# Altium PCB microsmt_pnpboard_v17.pcbdoc (part 2 of 3)
Units mil, origin at the board's own origin, x right, y up, seen from the top; angles counter-clockwise.
Board outline 5834.36 x 5120.39 mil, 2 copper layers (Top Layer, Bottom Layer); 189 components, 130 nets, 641 pads, 1441 vias.
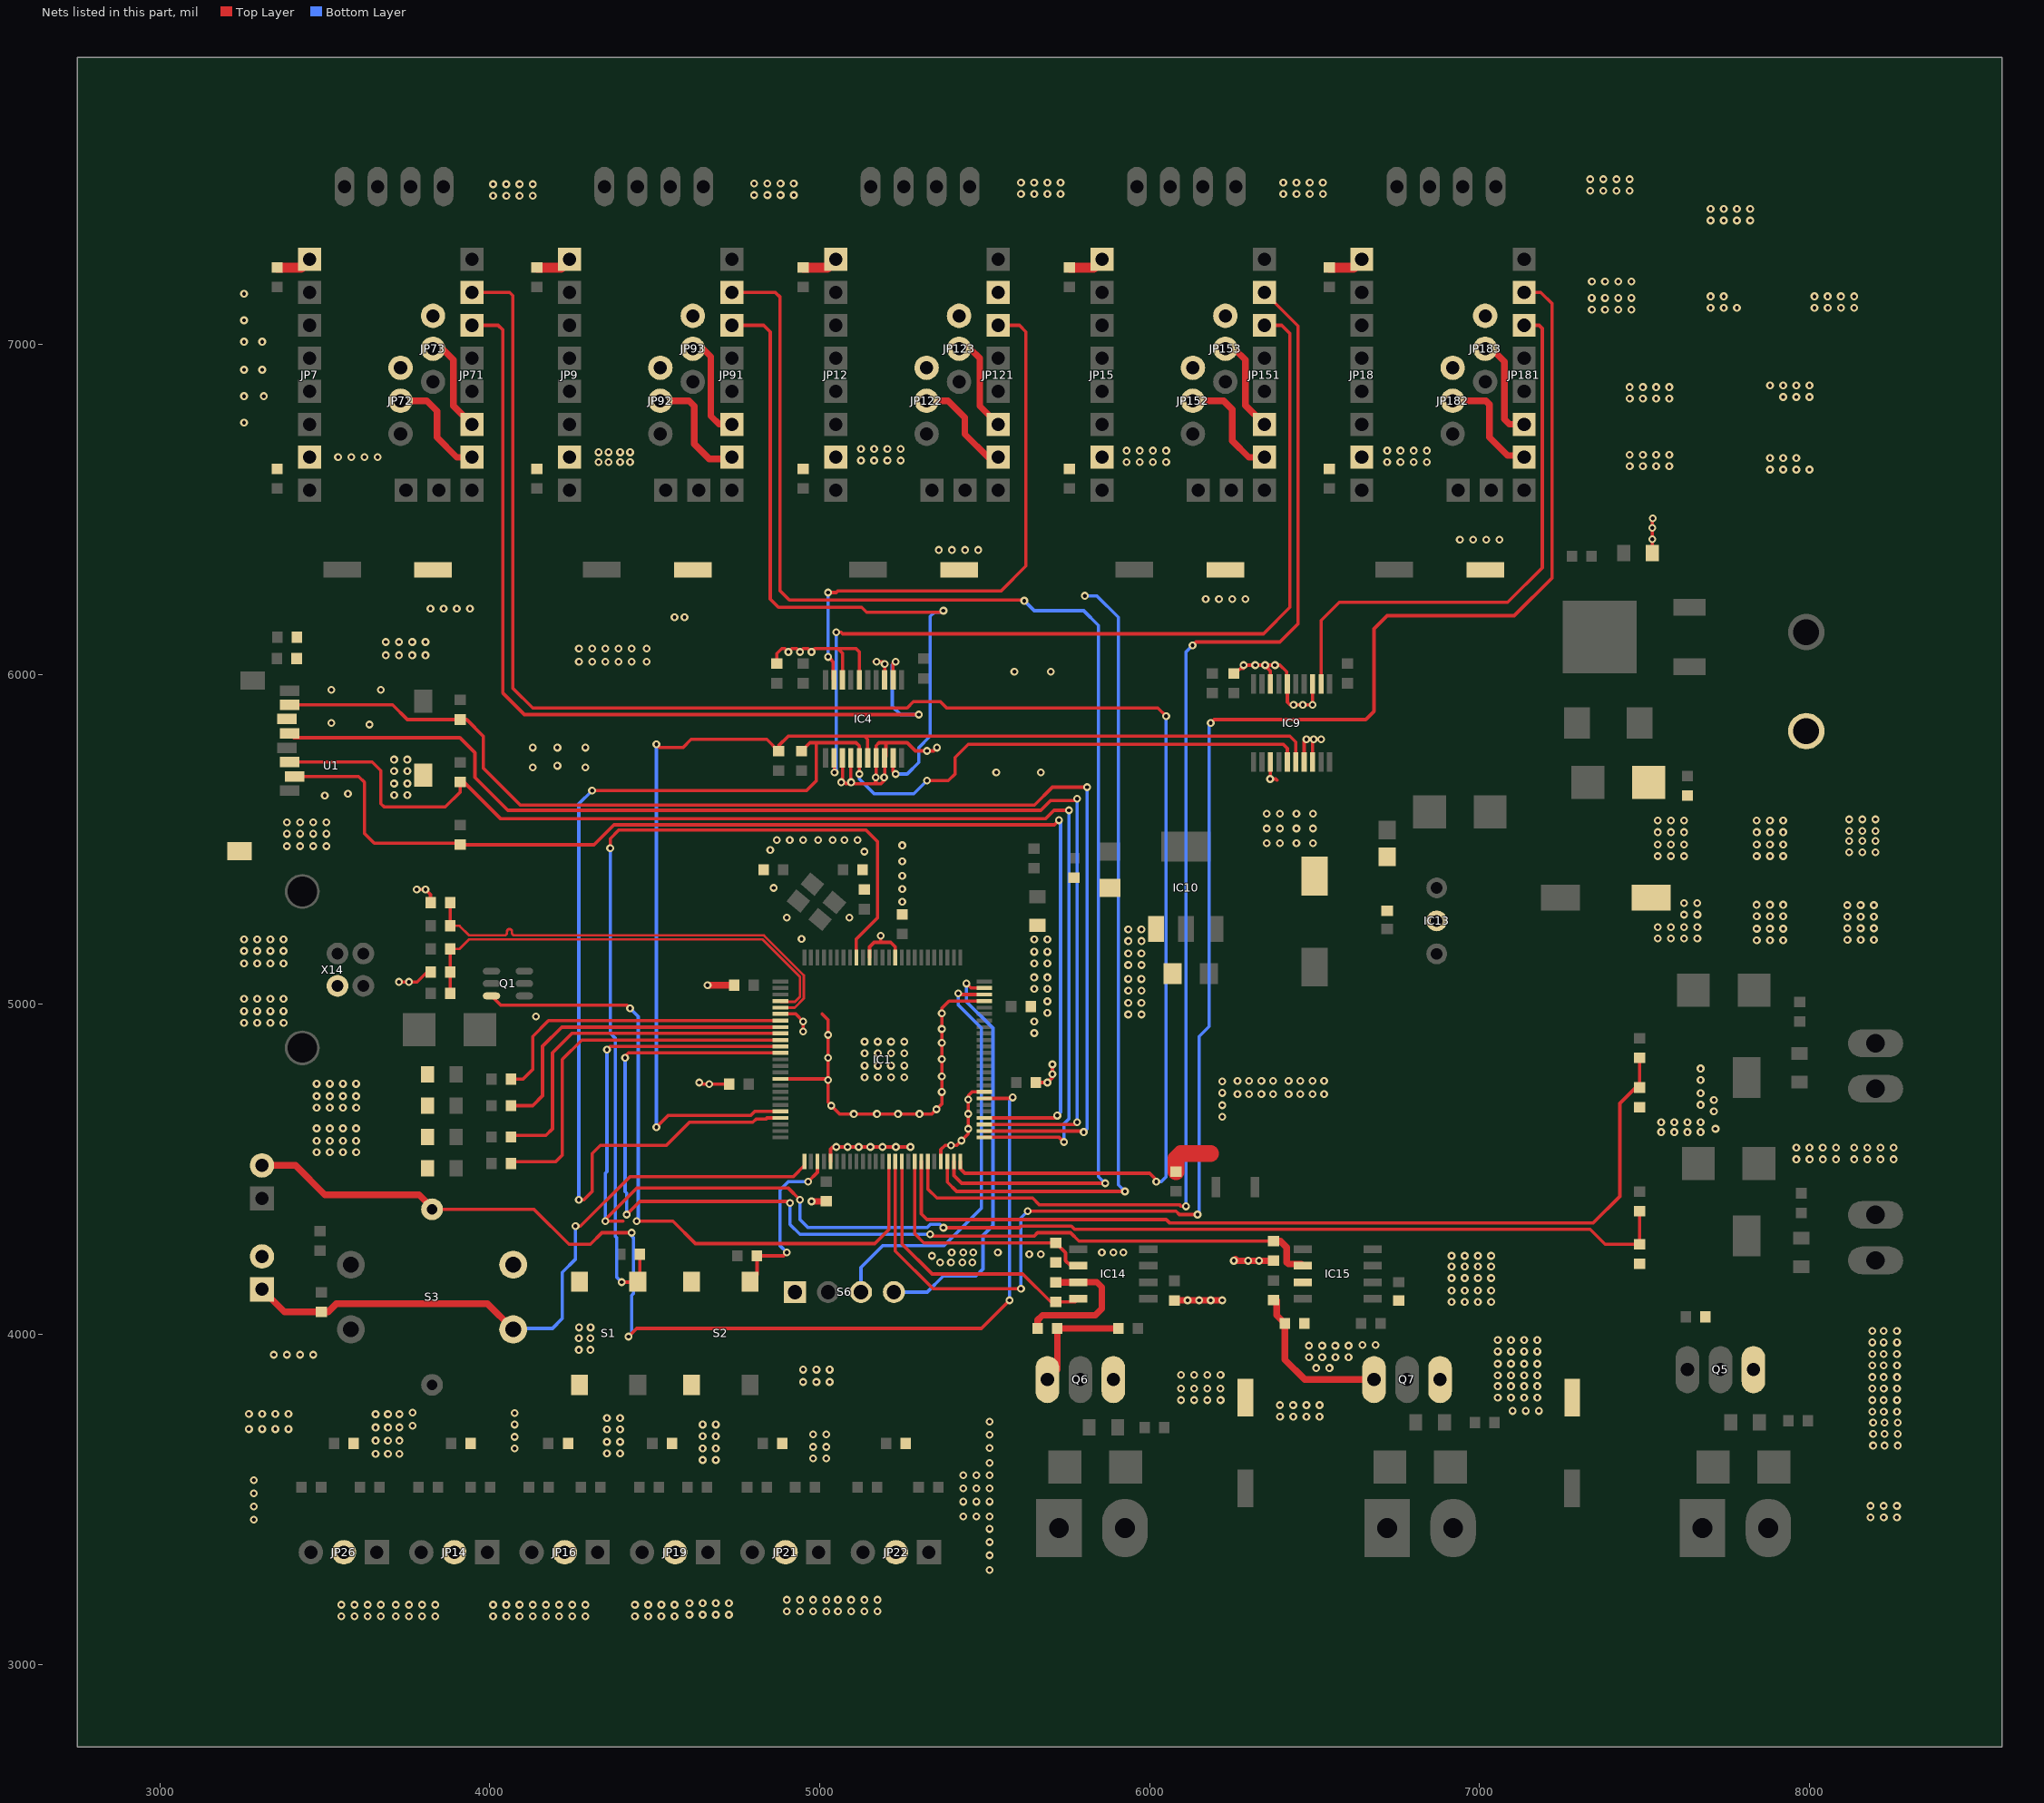
[diagram p2: the nets of this part, all layers, seen from the top]

## Via types
v1: diameter 24, hole 12, Top Layer to Bottom Layer, 1009 vias
v2: diameter 24.02, hole 12.01, Top Layer to Bottom Layer, 428 vias
v3: diameter 149.61, hole 137.8, Top Layer to Bottom Layer, 4 vias

## Nets (pads, with @x,y where several pads share a name; then routed paths per layer and width w, separated by ;. In a path a pad name is that pad's centre, name@x,y a point inside that pad or via, vN(x,y) a via of type N, cw(c..) or ccw(c..) an arc to the next point about the centre after c; other vN are vias at no path point) (continued)
GND: C1.1 C2.2 C3.2 C4.1 C5.1 C7.C C8.1 C9.1 C10.1 C11.1 C12.1 C13.1 C14.1 C31.1 C62.2 C63.2 C64.C C65.2 C66.2 C67.1 C68.1 C75.2 C76.2 C77.2 C78.2 C79.2 C80.2 C81.2 C82.2 C83.2 C84.2 C85.2 C86.2 C87.2 C88.2 C89.2 C90.2 C91.2 C92.2 C93.2 C94.2 C95.2 C96.2 C97.2 C98.2 C99.2 C101.2 C102.2 D4.A IC1.11 IC1.15 IC1.31 IC1.41 IC1.55 IC1.72 IC1.83 IC1.97 IC4.3 IC4.4 IC4.7 IC4.8 IC4.13 IC4.16 IC4.18 IC9.3 IC9.7 IC9.8 IC9.13 IC9.16 IC9.18 IC10.1 IC13.2 IC14.3 IC15.3 J1.1 JP7.1 JP7.7 JP9.1 JP9.7 JP12.1 JP12.7 JP14.2 JP15.1 JP15.7 JP16.2 JP18.1 JP18.7 JP19.2 JP21.2 JP22.2 JP23.2 JP26.2 JP72.3 JP73.3 JP92.3 JP93.3 JP122.3 JP123.3 JP152.3 JP153.3 JP182.3 JP183.3 LED1.1 LED2.1 LED3.1 LED4.1 LED9.1 LED10.1 Q5.S Q6.S Q7.S R71.1 R72.1 R74.2 R83.2 R86.2 R87.1 R89.2 R90.2 R91.2 S1.2 S1.4 S2.2 S2.4 S3.2 S6.1 U1.6 U1.CD2 U1.GND1 X14.GND | length 6173.9
  Top Layer w10: v2(3725.5,5068.39) v2(3755.5,5068.39) 3780.5,5068.39 3810.5,5098.39 C5.1@3820.84,5098.39 ; v2(3779.2,5348.39) v2(3805.5,5348.39) 3820.84,5333.05 C4.1@3820.84,5308.39 ; v1(4635.5,4763.39) 4640.5,4763.39 4645.5,4758.39 v1(4665.5,4758.39) C9.1@4726.18,4758.39 ; C31.1@4870.5,6032.71 4870.5,6063.39 4885.5,6078.39 4895.5,6078.39 v1(4905.5,6068.39) 4915.5,6078.39 4930.5,6078.39 v1(4940.5,6068.39) 4950.5,6078.39 4965.5,6078.39 v1(4975.5,6068.39) 4985.5,6078.39 5055.5,6078.39 ; IC1.41@4881.5,4774.38 5016.93,4774.38 v1@5025.5,4765.81 ; IC1.31@4881.5,4971.38 4927.5,4971.38 v2(4950.5,4948.39) v2(4950.5,4918.39) ; 5007.5,4971.38 5025.5,4953.39 v1(5025.5,4907.77) v1(5025.5,4838.55) v1@5025.5,4765.81 ; IC1.55@5033.5,4524.38 5033.5,4561.39 5040.5,4568.39 v1(5084.75,4568.39) v1(5118.61,4568.39) v1(5154.05,4568.39) v1(5190.57,4568.39) v1(5231.42,4568.39) v1(5275.5,4568.39) v1@5280.5,4573.39 ; IC4.3@5069.32,5747.09 5069.32,5679.57 5080.5,5668.39 5090.5,5668.39 v1(5095.5,5673.39) ; IC4.18@5069.32,5983.19 5069.32,6064.57 5055.5,6078.39 ; IC4.4@5094.91,5747.09 5094.91,5673.98 v1(5095.5,5673.39) ; IC4.16@5120.5,5983.39 5120.5,6068.39 5110.5,6078.39 5055.5,6078.39 ; IC1.15@5151.5,5142.38 5151.5,5174.39 5165.5,5188.39 5185.67,5188.39 ; v1@5165.5,6038.39 5190.5,6038.39 v1(5197.27,6031.62) IC4.13@5197.27,5983.39 ; 5169.66,5674.9 5171.68,5672.88 5167.19,5668.39 ; 5170.5,5674.06 5170.5,5675.75 ; v1(5170.5,5688.39) 5170.5,5675.75 ; v2(5185.5,5208.39) 5185.5,5188.55 5185.67,5188.39 ; IC1.11@5229.5,5142.38 5229.5,5174.39 5215.5,5188.39 5185.67,5188.39 ; v1(5355.5,5778.39) 5345.5,5768.39 v1(5325.5,5768.39) 5290.5,5768.39 5265.5,5793.39 5201.16,5793.39 ; IC1.72@5367.5,4524.38 5367.5,4560.39 5380.5,4573.39 v1(5398.52,4573.39) 5415.5,4573.39 v1(5429.77,4587.65) 5450.5,4608.39 v1(5450.5,4623.22) v1(5450.5,4668.68) 5450.5,4723.39 5462.5,4735.38 IC1.83@5499.5,4735.38 ; IC1.97@5499.5,5010.38 5392.5,5010.38 5370.5,4988.39 v1(5370.5,4973.39) v1(5370.5,4925.67) v1(5370.5,4883.84) v1(5370.5,4834.36) v1(5370.5,4781.93) v1(5370.5,4734.8) 5370.5,4698.39 v1(5354.58,4682.46) 5340.5,4668.39 v1(5302.83,4668.39) v1(5238.03,4668.39) v1(5173.82,4668.39) v1(5103.71,4668.39) 5060.5,4668.39 v1(5035.65,4693.24) 5025.5,4703.39 v1@5025.5,4765.81 ; C12.1@5655.5,4763.39 v1(5690.5,4763.39) 5705.5,4778.39 v1(5705.5,4818.39) ; C68.1@6255.5,6003.39 6260.5,6003.39 6275.5,6018.39 6285.5,6018.39 6295.5,6028.39 v1(6320.5,6028.39) v1(6350.5,6028.39) 6350.5,6026.68 6358.79,6018.39 ; IC9.3@6366.52,5735.24 6366.52,5689.41 6365.5,5688.39 v1(6365.5,5683.39) 6382.87,5683.39 6386.85,5679.41 ; IC9.18@6366.52,5971.34 6366.52,6010.65 6358.79,6018.39 ; IC9.7@6468.89,5735.24 6468.89,5796.77 v1(6475.5,5803.39) v1(6497.69,5803.39) ; IC9.8@6494.48,5735.24 6494.48,5800.18 v1(6497.69,5803.39) ; IC9.13@6494.48,5971.54 v1(6494.48,5908.39) v1(6464.57,5908.39) 6425.5,5908.39 6417.7,5916.18 IC9.16@6417.7,5971.54 6415.5,5973.75 6415.5,6008.39 6395.5,6028.39 v1(6380.5,6028.39) 6358.79,6028.39 6358.79,6018.39 ; v1(6520.5,5803.39) v1(6497.69,5803.39) ; LED10.1@7523.81,6368.39 v1(7523.81,6409.82) v1(7523.81,6444.58) 7523.81,6471.7 v1(7525.5,6473.39) ; v1(5095.5,5673.39) 5100.5,5668.39 5167.19,5668.39 ; 5167.19,5668.39 5185.5,5668.39 5195.5,5678.39 v1(5195.5,5688.39) 5197.27,5690.16 IC4.8@5197.27,5747.09 5201.16,5750.98 5201.16,5793.39 ; 5170.5,5675.75 5171.68,5674.57 IC4.7@5171.68,5747.09 5171.68,5784.57 5180.5,5793.39 5201.16,5793.39
  Top Layer w20: v2(4660.5,5058.39) C10.1@4741.18,5058.39 ; v1(4975.5,4403.39) C8.1@5020.5,4403.39 ; R90.2@5661.18,4018.39 5661.18,4044.07 5675.5,4058.39 5835.5,4058.39 5855.5,4078.39 5855.5,4143.39 5840.5,4158.39 IC14.3@5784.5,4158.39 5783.82,4157.71 R72.1@5715.5,4157.71 ; C66.2@6075.5,4103.39 v1(6115.5,4103.39) v1(6150.5,4103.39) v1(6185.5,4103.39) v1(6220.5,4103.39) ; v1(6255.5,4223.39) 6260.5,4228.39 6265.5,4223.39 v1(6299.24,4223.39) v1(6332.23,4223.39) R87.1@6375.5,4223.39
  Top Layer w30: C85.2@3355.97,7233.09 3429.34,7233.09 JP7.1@3454.4,7258.15 ; C88.2@4143.37,7233.09 4216.73,7233.09 JP9.1@4241.8,7258.15 ; C91.2@4950.46,7233.09 5023.82,7233.09 JP12.1@5048.89,7258.15 ; C94.2@5757.55,7233.09 5830.91,7233.09 JP15.1@5855.97,7258.15 ; C97.2@6544.95,7233.09 6618.31,7233.09 JP18.1@6643.37,7258.15
  Top Layer w50: C62.2@6080.5,4493.05 6080.5,4533.39 6095.5,4548.39 6185.5,4548.39
  other v1: 3550.6,3145.89 3590.55,3145.89 3630.51,3145.89 3670.47,3145.89 3715.6,3145.89 3755.55,3145.89 3795.51,3145.89 3835.47,3145.89 4010.6,3145.89 4050.55,3145.89 4090.51,3145.89 4130.47,3145.89 4170.6,3145.89 4210.55,3145.89 4250.51,3145.89 4290.47,3145.89 4440.6,3145.89 4480.55,3145.89 4520.51,3145.89 4560.47,3145.89 4605.6,3150.89 4645.55,3150.89 4685.51,3150.89 4725.47,3150.89 4900.6,3160.89 4940.55,3160.89 4980.51,3160.89 5020.47,3160.89 5055.6,3160.89 5095.55,3160.89 5135.51,3160.89 5175.47,3160.89 3550.53,3180.89 3590.49,3180.89 3630.45,3180.89 3670.4,3180.89 3715.53,3180.89 3755.49,3180.89 3795.45,3180.89 3835.4,3180.89 4010.53,3180.89 4050.49,3180.89 4090.45,3180.89 4130.4,3180.89 4170.53,3180.89 4210.49,3180.89 4250.45,3180.89 4290.4,3180.89 4440.53,3180.89 4480.49,3180.89 4520.45,3180.89 4560.4,3180.89 4605.53,3185.89 4645.49,3185.89 4685.45,3185.89 4725.4,3185.89 4900.53,3195.89 4940.49,3195.89 4980.45,3195.89 5020.4,3195.89 5055.53,3195.89 5095.49,3195.89 5135.45,3195.89 5175.4,3195.89 5515.5,3285.89 5515.5,3330.89 5515.5,3370.89 5515.5,3410.89 3285.5,3438.45 8185.55,3445.89 8225.51,3445.89 8265.47,3445.89 5435.54,3448.39 5475.5,3448.39 5515.46,3448.39 3285.5,3478.41 8185.49,3480.89 8225.45,3480.89 8265.4,3480.89 5435.54,3493.39 5475.5,3493.39 5515.46,3493.39 3285.5,3518.36 5435.54,3533.39 5475.5,3533.39 5515.46,3533.39 3285.5,3558.32 5435.54,3573.39 5475.5,3573.39 5515.46,3573.39 5515.5,3610.89 4645.57,3619.64 4685.53,3619.64 4980.57,3624.64 5020.53,3624.64 3654.25,3638.45 3691.75,3638.42 3726.75,3638.48 4355.57,3639.64 4395.53,3639.64 4075.53,3654.64 4645.51,3654.64 4685.46,3654.64 5515.5,3655.89 4980.51,3659.64 5020.46,3659.64 8193,3663.39 8227.94,3663.39 8268,3663.39 4355.51,3674.64 4395.46,3674.64 3654.25,3678.41 3691.75,3678.38 3726.75,3678.44 4075.46,3689.64 4645.54,3692.14 4685.49,3692.14 5515.5,3695.89 4980.54,3697.14 5020.49,3697.14 8193,3698.39 8227.94,3698.39 8268,3698.39 4355.54,3712.14 4395.49,3712.14 3270.56,3713.39 3310.52,3713.39 3350.48,3713.39 3390.44,3713.39 3654.25,3718.36 3691.75,3718.33 3726.75,3718.4 3766.75,3723.36 4075.49,3727.14 4645.47,3727.14 4685.43,3727.14 8193,3733.39 8227.94,3733.39 8268,3733.39 5515.5,3735.89 4355.47,3747.14 4395.43,3747.14 6395.6,3750.89 6435.55,3750.89 6475.51,3750.89 6515.47,3750.89 3654.25,3758.32 3691.75,3758.29 3726.75,3758.35 3270.6,3759.2 3310.55,3759.2 3350.51,3759.2 3390.47,3759.2 4075.43,3762.14 3766.75,3763.32 8190.56,3765.89 8225.5,3765.89 8265.56,3765.89 7100.56,3768.39 7140.52,3768.39 7180.48,3768.39 6395.53,3785.89 6435.49,3785.89 6475.45,3785.89 6515.4,3785.89 6095.6,3800.89 6135.55,3800.89 6175.51,3800.89 6215.47,3800.89 8190.5,3800.89 8225.44,3800.89 8265.5,3800.89 7055.56,3808.39 7095.52,3808.39 7135.48,3808.39 7175.44,3808.39 6095.53,3835.89 6135.49,3835.89 6175.45,3835.89 6215.4,3835.89 8190.56,3835.89 8225.5,3835.89 8265.56,3835.89 7055.56,3843.39 7095.52,3843.39 7135.48,3843.39 7175.44,3843.39 4950.53,3855.89 4990.49,3855.89 5030.45,3855.89 8190.5,3870.89 8225.44,3870.89 8265.5,3870.89 7055.6,3875.89 7095.55,3875.89 7135.51,3875.89 7175.47,3875.89 6095.58,3877.14 6135.54,3877.14 6175.49,3877.14 6215.45,3877.14 4950.54,3893.39 4990.5,3893.39 5030.46,3893.39 6505.52,3898.39 6545.48,3898.39 8190.56,3905.89 8225.47,3905.89 8265.53,3905.89 7055.53,3910.89 7095.49,3910.89 7135.45,3910.89 7175.4,3910.89 6483.55,3930.89 6523.51,3930.89 6563.47,3930.89 6603.42,3930.89 3345.56,3938.39 3385.52,3938.39 3425.48,3938.39 3465.44,3938.39 8190.5,3940.89 8225.4,3940.89 8265.47,3940.89 7055.56,3948.39 7095.52,3948.39 7135.48,3948.39 7175.44,3948.39 4270.5,3953.39 4305.5,3953.39 6483.49,3965.89 6523.44,3965.89 6563.4,3965.89 6603.36,3965.89 6645.52,3968.39 6685.48,3968.39 8190.56,3975.89 8225.47,3975.89 8265.53,3975.89 7055.56,3983.39 7095.52,3983.39 7135.48,3983.39 7175.44,3983.39 4270.5,3988.39 4305.5,3988.39 8190.5,4010.89 8225.4,4010.89 8265.47,4010.89 4270.66,4021.26 4306.09,4021.26 6915.56,4098.39 6955.52,4098.39 6995.48,4098.39 7035.44,4098.39 6915.56,4133.39 6955.52,4133.39 6995.48,4133.39 7035.44,4133.39 6915.6,4170.89 6955.55,4170.89 6995.51,4170.89 7035.47,4170.89 6915.53,4205.89 6955.49,4205.89 6995.45,4205.89 7035.4,4205.89 6915.56,4238.39 6955.52,4238.39 6995.48,4238.39 7035.44,4238.39 7960.6,4530.89 8000.55,4530.89 8040.51,4530.89 8080.47,4530.89 8135.6,4530.89 8175.55,4530.89 8215.51,4530.89 8255.47,4530.89 3475.6,4552.14 3515.55,4552.14 3555.51,4552.14 3595.47,4552.14 7960.53,4565.89 8000.49,4565.89 8040.45,4565.89 8080.4,4565.89 8135.53,4565.89 8175.49,4565.89 8215.45,4565.89 8255.4,4565.89 5050.89,4568.39 3475.53,4587.14 3515.49,4587.14 3555.45,4587.14 3595.4,4587.14 7550.56,4613.39 7590.52,4613.39 7630.48,4613.39 7670.44,4613.39 7715.5,4623.39 3475.56,4624.64 3515.52,4624.64 3555.48,4624.64 3595.44,4624.64 7550.56,4643.39 7590.52,4643.39 7630.48,4643.39 7670.44,4643.39 6220.53,4659.64 7710.53,4675.89 3475.6,4687.14 3515.55,4687.14 3555.51,4687.14 3595.47,4687.14 6220.46,4694.64 7670.53,4695.89 7710.47,4710.89 5450.5,4711.62 3475.53,4722.14 3515.49,4722.14 3555.45,4722.14 3595.4,4722.14 6266.75,4728.36 6301.75,4728.42 6339.25,4728.39 6374.25,4728.46 6421.75,4728.36 6456.75,4728.42 6494.25,4728.39 6529.25,4728.46 7670.47,4730.89 6220.49,4732.14 3475.56,4759.64 3515.52,4759.64 3555.48,4759.64 3595.44,4759.64 6220.43,4767.14 6266.75,4768.32 6301.75,4768.38 6339.25,4768.35 6374.25,4768.41 6421.75,4768.32 6456.75,4768.38 6494.25,4768.35 6529.25,4768.41 5025.5,4771.32 7670.53,4770.89 5136.66,4779.63 5176.62,4779.63 5216.58,4779.63 5256.54,4779.63 5705.5,4788.66 7670.47,4805.89 5136.6,4814.63 5176.56,4814.63 5216.52,4814.63 5256.47,4814.63 5136.63,4852.13 5176.59,4852.13 5216.55,4852.13 5256.5,4852.13 5136.57,4887.13 5176.53,4887.13 5216.48,4887.13 5256.44,4887.13 5650.5,4913.39 3255.61,4944.64 3295.57,4944.64 3335.53,4944.64 3375.48,4944.64 5650.5,4948.39 5935.57,4969.64 5975.53,4969.64 5690.53,4974.64 3255.55,4979.64 3295.51,4979.64 3335.46,4979.64 3375.42,4979.64 5935.51,5004.64 5975.46,5004.64 5690.46,5009.64 3255.58,5017.14 3295.54,5017.14 3335.49,5017.14 3375.45,5017.14 5935.54,5042.14 5975.49,5042.14 5650.54,5047.14 5690.49,5047.14 5935.47,5077.14 5975.43,5077.14 5650.47,5082.14 5690.43,5082.14 5935.57,5119.64 5975.53,5119.64 3255.55,5124.64 3295.51,5124.64 3335.46,5124.64 3375.42,5124.64 5650.57,5124.64 5690.53,5124.64 5935.51,5154.64 5975.46,5154.64 5650.51,5159.64 5690.46,5159.64 3255.58,5162.14 3295.54,5162.14 3335.49,5162.14 3375.45,5162.14 5935.54,5192.14 5975.49,5192.14 7840.61,5194.64 7880.57,5194.64 7920.53,5194.64 8115.55,5195.89 8155.51,5195.89 8195.47,5195.89 3255.52,5197.14 3295.47,5197.14 3335.43,5197.14 3375.39,5197.14 5650.54,5197.14 5690.49,5197.14 7540.61,5199.64 7580.57,5199.64 7620.53,5199.64 7660.48,5199.64 5935.47,5227.14 5975.43,5227.14 7840.55,5229.64 7880.51,5229.64 7920.46,5229.64 8115.49,5230.89 8155.45,5230.89 8195.4,5230.89 7540.55,5234.64 7580.51,5234.64 7620.46,5234.64 7660.42,5234.64 8115.55,5265.89 8155.51,5265.89 8195.47,5265.89 7840.58,5267.14 7880.54,5267.14 7920.49,5267.14 7620.49,5272.14 7660.45,5272.14 8115.49,5300.89 8155.45,5300.89 8195.4,5300.89 7840.52,5302.14 7880.47,5302.14 7920.43,5302.14 7620.43,5307.14 7660.39,5307.14 5250.5,5311.24 5250.5,5350.12 5250.5,5389.5 5250.5,5433.68 7540.61,5449.64 7580.57,5449.64 7620.53,5449.64 7840.61,5449.64 7880.57,5449.64 7920.53,5449.64 8120.55,5460.89 8160.51,5460.89 8200.47,5460.89 5135.5,5463.39 4850.5,5468.39 3385.55,5479.64 3425.51,5479.64 3465.46,5479.64 3505.42,5479.64 5250.5,5482.28 7540.55,5484.64 7580.51,5484.64 7620.46,5484.64 7840.55,5484.64 7880.51,5484.64 7920.46,5484.64 8120.49,5495.89 8160.45,5495.89 8200.4,5495.89 4870.5,5498.39 4909.59,5498.39 4950.33,5498.39 4995.5,5498.39 5039.46,5498.39 5075.5,5498.39 5115.5,5498.39 3385.58,5517.14 3425.54,5517.14 3465.49,5517.14 3505.45,5517.14 7540.58,5522.14 7580.54,5522.14 7620.49,5522.14 7840.58,5522.14 7880.54,5522.14 7920.49,5522.14 8120.55,5525.89 8160.51,5525.89 8200.47,5525.89 3385.52,5552.14 3425.47,5552.14 3465.43,5552.14 3505.39,5552.14 7540.52,5557.14 7580.47,5557.14 7620.43,5557.14 7840.52,5557.14 7880.47,5557.14 7920.43,5557.14 8120.49,5560.89 8160.45,5560.89 8200.4,5560.89 3710.57,5634.64 3750.53,5634.64 3710.51,5669.64 3750.46,5669.64 5065.5,5673.39 3710.54,5707.14 3750.49,5707.14 3710.47,5742.14 3750.43,5742.14 6436.81,5908.39 6285.5,6028.39 4270.56,6038.39 4310.52,6038.39 4350.48,6038.39 4390.44,6038.39 4430.5,6038.39 4475.5,6038.39 5172.84,6038.39 3685.56,6058.39 3725.52,6058.39 3765.48,6058.39 3805.44,6058.39 4270.56,6078.39 4310.52,6078.39 4350.48,6078.39 4390.44,6078.39 4430.5,6078.39 4475.5,6078.39 3685.56,6098.39 3725.52,6098.39 3765.48,6098.39 3805.44,6098.39 4560.5,6173.39 4590.5,6173.39 3820.61,6199.64 3860.57,6199.64 3900.53,6199.64 3940.48,6199.64 6170.5,6228.39 6210.5,6228.39 6250.5,6228.39 6290.5,6228.39 5361.39,6377.37 5401.35,6377.37 5441.3,6377.37 5481.26,6377.37 6940.5,6408.39 6980.5,6408.39 7020.5,6408.39 7060.5,6408.39 7880.6,6620.89 7920.55,6620.89 7960.51,6620.89 8000.47,6620.89 7455.6,6630.89 7495.55,6630.89 7535.51,6630.89 7575.47,6630.89 4330.5,6643.39 4360.5,6643.39 4395.5,6643.39 4425.5,6643.39 5930.5,6643.39 5970.5,6643.39 6010.5,6643.39 6050.5,6643.39 6720.5,6643.39 6760.5,6643.39 6800.5,6643.39 6840.5,6643.39 5125.56,6648.39 5165.52,6648.39 5205.48,6648.39 5245.44,6648.39 7880.53,6655.89 7920.49,6655.89 7960.45,6655.89 3540.56,6658.39 3580.52,6658.39 3620.48,6658.39 3660.44,6658.39 7455.53,6665.89 7495.49,6665.89 7535.45,6665.89 7575.4,6665.89 4330.5,6673.39 4360.5,6673.39 4395.5,6673.39 4425.5,6673.39 5930.5,6678.39 5970.5,6678.39 6010.5,6678.39 6050.5,6678.39 6720.5,6678.39 6760.5,6678.39 6800.5,6678.39 6840.5,6678.39 5125.56,6683.39 5165.52,6683.39 5205.48,6683.39 5245.44,6683.39 7455.6,6835.89 7495.55,6835.89 7535.51,6835.89 7575.47,6835.89 7920.55,6840.89 7960.51,6840.89 8000.47,6840.89 7455.53,6870.89 7495.49,6870.89 7535.45,6870.89 7575.4,6870.89 7880.53,6875.89 7920.49,6875.89 7960.45,6875.89 8000.4,6875.89 7340.6,7105.89 7380.55,7105.89 7420.51,7105.89 7460.47,7105.89 7700.6,7110.89 7740.55,7110.89 7780.51,7110.89 8015.6,7110.89 8055.55,7110.89 8095.51,7110.89 8135.47,7110.89 7340.53,7140.89 7380.49,7140.89 7420.45,7140.89 7460.4,7140.89 7700.53,7145.89 7740.49,7145.89 8015.53,7145.89 8055.49,7145.89 8095.45,7145.89 8135.4,7145.89 7340.6,7190.89 7380.55,7190.89 7420.51,7190.89 7460.47,7190.89 7700.6,7375.89 7740.55,7375.89 7780.51,7375.89 7820.47,7375.89 7700.53,7410.89 7740.49,7410.89 7780.45,7410.89 7820.4,7410.89 4010.6,7450.89 4050.55,7450.89 4090.51,7450.89 4130.47,7450.89 4802,7452.89 4841.95,7452.89 4881.91,7452.89 4921.87,7452.89 5610.6,7455.89 5650.55,7455.89 5690.51,7455.89 5730.47,7455.89 6405.6,7455.89 6445.55,7455.89 6485.51,7455.89 6525.47,7455.89 7335.6,7465.89 7375.55,7465.89 7415.51,7465.89 7455.47,7465.89 4010.53,7485.89 4050.49,7485.89 4090.45,7485.89 4130.4,7485.89 4801.93,7487.89 4841.89,7487.89 4881.85,7487.89 4921.8,7487.89 5610.53,7490.89 5650.49,7490.89 5690.45,7490.89 5730.4,7490.89 6405.53,7490.89 6445.49,7490.89 6485.45,7490.89 6525.4,7490.89 7335.53,7500.89 7375.49,7500.89 7415.45,7500.89 7455.4,7500.89
  other v2: 5365.5,4218.39 5398,4218.39 5433,4218.39 5463,4218.39 5340.5,4238.39 5635.5,4243.39 5670.5,4243.39 5400.5,4248.39 5435.5,4248.39 5465.5,4248.39 5540.5,4248.39 5855.5,4248.39 5890.5,4248.45 5920.5,4248.39 4140.5,4963.39 4945.5,5198.39 4900.5,5263.39 5090.5,5263.39 4860.5,5353.39 6355.5,5488.39 6395.5,5488.39 6445.5,5488.39 6495.5,5488.39 6355.5,5533.39 6395.5,5533.39 6445.5,5533.39 6495.5,5533.39 6355.5,5578.39 6395.5,5578.39 6445.5,5578.39 6495.5,5578.39 3500.5,5633.39 3570.5,5638.39 5535.5,5703.39 5670.5,5703.39 4130.5,5718.39 4290.5,5718.39 4205.5,5723.39 4130.5,5778.39 4205.5,5778.39 4290.5,5778.39 3635.5,5848.39 3520.5,5853.39 3520.5,5953.39 3670.5,5953.39 5590.5,6008.39 5700.5,6008.39 3255.5,6763.39 3255.5,6843.39 3315.5,6843.39 3255.5,6923.39 3310.5,6923.39 3255.5,7008.39 3310.5,7008.39 3255.5,7073.39 3255.5,7153.39
GPIO_FET: Q7.G R70.2 R91.1 | length 485.5
  Top Layer w20: R70.2@6385.5,4103.73 6385.5,4058.39 R91.1@6410.5,4033.39 6410.5,3923.39 6470.5,3863.39 Q7.G@6680.5,3863.39
ISPBOOT: IC1.53 R15.1 S2.1 | length 547.8
  Top Layer w10: S2.1@4789.08,4159.88 4810.5,4181.3 R15.1@4810.5,4238.39 4890.5,4238.39 v2(4900.5,4248.39) ; v2(4965.5,4463.39) 4993.5,4491.39 IC1.53@4993.5,4524.38
  Bottom Layer w10: v2(4900.5,4248.39) 4880.5,4268.39 4880.5,4438.39 4905.5,4463.39 v2(4965.5,4463.39)
LED1: IC1.32 R10.2 | length 948.6
  Top Layer w10: R10.2@4065.16,4773.39 4100.5,4773.39 4130.5,4803.39 4130.5,4903.39 4178.5,4951.38 IC1.32@4881.5,4951.38
LED2: IC1.33 R11.2 | length 1002.8
  Top Layer w10: R11.2@4065.16,4693.39 4130.5,4693.39 4160.5,4723.39 4160.5,4873.39 4218.5,4931.38 IC1.33@4881.5,4931.38
LED3: IC1.34 R12.2 | length 1081.1
  Top Layer w10: R12.2@4065.16,4598.39 4070.16,4603.39 4170.5,4603.39 4190.5,4623.39 4190.5,4853.39 4249.5,4912.38 IC1.34@4881.5,4912.38
LED4: IC1.35 R13.2 | length 1141.1
  Top Layer w10: R13.2@4065.16,4518.39 4070.16,4523.39 4200.5,4523.39 4220.5,4543.39 4220.5,4833.39 4279.5,4892.38 IC1.35@4881.5,4892.38
MS1: JP71.7 JP72.2 | length 334.3
  Top Layer w20: JP72.2@3729.99,6829.41 3809.48,6829.41 3840.5,6798.39 3840.5,6718.39 3900.74,6658.15 JP71.7@3946.53,6658.15
MS2: JP71.6 JP73.2 | length 294.4
  Top Layer w20: JP73.2@3828.41,6986.89 3857,6986.89 3890.5,6953.39 3890.5,6814.17 JP71.6@3946.53,6758.15
MS3: JP91.7 JP92.2 | length 358.8
  Top Layer w20: JP92.2@4517.39,6829.41 4604.48,6829.41 4620.5,6813.39 4620.5,6698.39 4665.5,6653.39 4729.16,6653.39 JP91.7@4733.93,6658.15
MS4: JP91.6 JP93.2 | length 318.3
  Top Layer w20: JP93.2@4615.81,6986.89 4647,6986.89 4670.5,6963.39 4670.5,6783.39 4695.74,6758.15 JP91.6@4733.93,6758.15
MS5: JP121.7 JP122.2 | length 316.8
  Top Layer w20: JP122.2@5324.48,6829.41 5389.48,6829.41 5440.5,6778.39 5440.5,6728.39 5510.74,6658.15 JP121.7@5541.01,6658.15
MS6: JP121.6 JP123.2 | length 297.6
  Top Layer w20: JP123.2@5422.9,6986.89 5457,6986.89 5485.5,6958.39 5485.5,6813.66 JP121.6@5541.01,6758.15
MS7: JP151.7 JP152.2 | length 343.1
  Top Layer w20: JP152.2@6131.56,6829.41 6224.48,6829.41 6250.5,6803.39 6250.5,6708.39 6300.74,6658.15 JP151.7@6348.1,6658.15
MS8: JP151.6 JP153.2 | length 293.5
  Top Layer w20: JP153.2@6229.99,6986.89 6257,6986.89 6290.5,6953.39 6290.5,6815.74 JP151.6@6348.1,6758.15
MS9: JP181.7 JP182.2 | length 346
  Top Layer w20: JP182.2@6918.96,6829.41 7019.48,6829.41 7030.5,6818.39 7030.5,6718.39 7085.5,6663.39 7130.26,6663.39 JP181.7@7135.49,6658.15
MS10: JP181.6 JP183.2 | length 315.4
  Top Layer w20: JP183.2@7017.39,6986.89 7037,6986.89 7075.5,6948.39 7075.5,6773.39 7090.74,6758.15 JP181.6@7135.49,6758.15
P0W: IC4.12 JP71.3 | length 2777.8
  Top Layer w10: JP71.3@3946.53,7058.15 4025.74,7058.15 4040.5,7043.39 4040.5,5943.39 4105.5,5878.39 v2(5300.5,5878.39) ; IC4.12@5222.86,5983.39 5222.86,6036.03 5225.22,6038.39 v2(5230.5,6038.39)
  Bottom Layer w10: v2(5230.5,6038.39) 5220.5,6028.39 5220.5,5903.39 5245.5,5878.39 v2(5300.5,5878.39)
P1_22: IC1.36 R82.2 R83.1 | length 4502.4
  Top Layer w10: v2(4355.5,4863.39) 4364.5,4872.38 IC1.36@4881.5,4872.38 ; 4404.13,4343.39 v2(4350.5,4343.39) 4350.5,4348.39 4445.5,4443.39 4905.5,4443.39 v2(4940.5,4408.39) ; v2(5375.5,4323.39) 5605.5,4323.39 5610.5,4328.39 5763.13,4328.39 5773.13,4318.39 7335.71,4318.39 7380.71,4273.39 R83.1@7485.5,4273.39 ; R83.1@7485.5,4273.05 R83.1@7485.5,4273.39 ; R82.2@7485.5,4373.73 R83.1@7485.5,4273.39
  Bottom Layer w10: v2(4350.5,4343.39) 4350.5,4488.39 4355.5,4493.39 v2(4355.5,4863.39) ; v2(4940.5,4408.39) 4940.5,4348.39 4964.2,4324.69 5326.8,4324.69 5335.5,4333.39 5365.5,4333.39 v2(5375.5,4323.39)
P1_23: IC1.37 IC15.2 R87.2 | length 3186.3
  Top Layer w10: v2(4410.5,4838.39) 4410.5,4843.39 4420.5,4853.38 IC1.37@4881.5,4853.38 ; v2(4415.5,4363.39) 4455.5,4403.39 4915.5,4403.39 v2(4910.5,4398.39) ; v2(5335.5,4303.39) 5340.5,4298.39 5650.5,4298.39 5660.5,4308.39 5760.5,4308.39 5786.18,4282.71 R87.2@6375.5,4282.71
  Top Layer w20: R87.2@6375.5,4282.71 6396.18,4282.71 6415.5,4263.39 6415.5,4218.39 6420.5,4213.39 6459.5,4213.39 IC15.2@6464.5,4208.39
  Bottom Layer w10: v2(4410.5,4838.39) 4410.5,4433.39 4415.5,4428.39 v2(4415.5,4363.39) ; v2(4910.5,4398.39) 4910.5,4333.39 4940.5,4303.39 v2(5335.5,4303.39)
P1W: IC4.9 JP91.3 | length 2119
  Top Layer w10: JP91.3@4733.93,7058.15 4830.74,7058.15 4850.5,7038.39 4850.5,6228.39 4875.5,6203.39 5127.31,6203.39 5142.31,6188.39 5370.5,6188.39 v2(5375.5,6193.39) ; IC4.9@5222.86,5747.09 5222.86,5706.03 v2(5230.5,5698.39)
  Bottom Layer w10: v2(5230.5,5698.39) 5265.5,5698.39 5300.5,5733.39 5300.5,5778.39 5335.5,5813.39 5335.5,6175.86 5348.02,6188.39 5370.5,6188.39 v2(5375.5,6193.39)
P2.7: IC1.66 IC14.4 R72.2 | length 861.7
  Top Layer w10: IC1.66@5249.5,4524.38 5249.5,4274.95 5341.06,4183.39 5615.5,4183.39 5700.5,4098.39 R72.2@5715.5,4098.39 5774.5,4098.39 IC14.4@5784.5,4108.39
P2.9: IC1.64 Q1.3 | length 2109.9
  Top Layer w10: Q1.3@4005.58,5025.99 4033.18,4998.39 4415.5,4998.39 v2(4425.5,4988.39) ; v2(4445.5,4343.39) 4555.5,4343.39 4623.51,4275.38 5167.49,4275.38 5210.5,4318.39 IC1.64@5210.5,4524.38
  Bottom Layer w10: v2(4425.5,4988.39) 4450.5,4963.39 4450.5,4348.39 v2(4445.5,4343.39)
P2W: IC4.19 JP121.3 | length 1728.1
  Top Layer w10: v2(5025.5,6248.39) 5050.5,6248.39 5055.5,6253.39 5550.5,6253.39 5625.5,6328.39 5625.5,7038.39 5605.74,7058.15 JP121.3@5541.01,7058.15 ; IC4.19@5043.74,5983.19 5040.5,5986.43 5040.5,6038.39 5038,6040.89 ; 5038,6040.89 5030.5,6053.39 v2(5025.5,6053.39) 5038,6040.89
  Bottom Layer w10: v2(5025.5,6053.39) v2(5025.5,6248.39)
P3W: IC4.2 JP151.3 | length 2802.3
  Top Layer w10: IC4.2@5043.73,5747.09 5045.5,5745.32 v2(5045.5,5703.39) ; v2(5050.5,6128.39) 5065.5,6128.39 5070.5,6123.39 6345.5,6123.39 6425.5,6203.39 6425.5,7033.39 6400.74,7058.15 JP151.3@6348.1,7058.15
  Bottom Layer w10: v2(5045.5,5703.39) 5050.5,5703.39 v2(5050.5,6128.39)
PLAY: IC1.51 JP23.1 R16.1 S3.4 | length 2073.6
  Top Layer w10: v2(4260.5,4328.39) 4275.5,4328.39 4425.5,4478.39 4920.5,4478.39 4954.5,4512.39 IC1.51@4954.5,4524.38
  Top Layer w20: JP23.1@3310.03,4136.62 3377.92,4068.73 R16.1@3490.5,4068.73 3510.84,4068.73 3535.5,4093.39 3993.5,4093.39 S3.4@4071.5,4015.39
  Bottom Layer w10: S3.4@4071.5,4015.39 4074.5,4018.39 4190.5,4018.39 4220.5,4048.39 4220.5,4188.39 4260.5,4228.39 v2(4260.5,4328.39)
PLAY_LED: IC1.82 JP24.2 S3.A | length 3469.2
  Top Layer w10: S3.A@3825.5,4379.39 3830.58,4379.39 4134.5,4379.39 4240.5,4273.39 4305.5,4273.39 4340.5,4308.39 v1(4430.5,4308.39) ; v1(4420.5,3993.39) 4445.5,4018.39 5490.5,4018.39 v2(5575.5,4103.39) ; IC1.82@5499.5,4715.38 5582.5,4715.38 v2(5585.5,4718.39)
  Top Layer w20: JP24.2@3310.03,4512.21 3411.68,4512.21 3500.5,4423.39 3786.58,4423.39 S3.A@3830.58,4379.39
  Bottom Layer w10: v1(4420.5,3993.39) 4430.5,4003.39 4430.5,4118.39 4435.5,4123.39 4435.5,4293.39 4430.5,4298.39 v1(4430.5,4308.39) ; v2(5575.5,4103.39) 5575.5,4708.39 v2(5585.5,4718.39)
POT_SCL: IC1.47 IC4.5 IC9.5 R36.1 | length 4588
  Top Layer w10: v2(4270.5,4408.39) 4285.5,4408.39 4310.5,4433.39 4310.5,4548.39 4335.5,4573.39 4535.5,4573.39 4605.5,4643.39 4797.87,4643.39 4806.87,4652.38 4836.9,4652.38 4840.9,4656.38 IC1.47@4881.5,4656.38 ; v2(4310.5,5648.39) 4960.5,5648.39 4990.5,5678.39 4990.5,5793.39 ; R36.1@4945.5,5768.05 4970.84,5793.39 4990.5,5793.39 ; v2(5120.5,5698.39) IC4.5@5120.5,5747.09 5120.5,5783.39 5110.5,5793.39 4990.5,5793.39 ; v2(5325.5,5678.39) 5390.5,5678.39 5410.5,5698.39 5410.5,5748.39 5450.5,5788.39 6405.5,5788.39 6417.7,5776.18 IC9.5@6417.7,5735.24
  Bottom Layer w10: v2(4270.5,4408.39) 4270.5,5608.39 v2(4310.5,5648.39) ; v2(5120.5,5698.39) 5120.5,5683.39 5165.5,5638.39 5285.5,5638.39 v2(5325.5,5678.39)
POT_SDA: IC1.46 IC4.6 IC9.6 R35.1 | length 3689.4
  Top Layer w10: v2(4505.5,4628.39) 4540.5,4663.39 4790.5,4663.39 4803.5,4676.38 IC1.46@4881.5,4676.38 ; v2(4505.5,5788.39) 4515.5,5778.39 4585.5,5778.39 4610.5,5803.39 4839.82,5803.39 R35.1@4875.5,5767.71 4875.5,5783.39 4905.5,5813.39 5135.5,5813.39 ; IC4.6@5146.04,5747.09 5145.5,5747.63 5145.5,5803.39 5135.5,5813.39 ; IC9.6@6443.24,5735.24 6443.24,5795.64 6425.5,5813.39 5135.5,5813.39
  Bottom Layer w10: v2(4505.5,4628.39) v2(4505.5,5788.39)
PW5: IC9.12 JP181.3 | length 1712.3
  Top Layer w10: IC9.12@6520.06,5971.54 6520.5,5971.98 6520.5,6163.39 6575.5,6218.39 7085.5,6218.39 7190.5,6323.39 7190.5,7048.39 7180.74,7058.15 JP181.3@7135.49,7058.15
PWM0: IC1.69 R73.2 R74.1 | length 2772.6
  Top Layer w10: IC1.69@5308.5,4524.38 5308.5,4365.39 5325.5,4348.39 6050.5,4348.39 6060.5,4338.39 7345.5,4338.39 7425.5,4418.39 7425.5,4700.42 7473.47,4748.39 R74.1@7485.5,4748.39 R73.2@7485.5,4838.73
PWM1: IC1.68 IC14.2 R71.2 | length 769.4
  Top Layer w10: IC1.68@5288.5,4524.38 5288.5,4305.39 5316.18,4277.71 R71.2@5715.5,4277.71 5745.5,4247.71 5745.5,4223.39 5760.5,4208.39 IC14.2@5784.5,4208.39
PWM1_FET: Q6.G R69.2 R90.1 | length 352.4
  Top Layer w20: Q6.G@5690.5,3863.39 5720.5,3893.39 R90.1@5720.5,4018.39 R69.2@5905.5,4018.39
RESET: IC1.17 R14.1 S1.1 | length 2706.8
  Top Layer w10: v2(4365.5,5473.39) 4365.5,5502.58 4391.3,5528.39 5140.5,5528.39 5175.5,5493.39 5175.5,5262.42 5111.5,5198.42 IC1.17@5111.5,5142.38 ; v2(4400.5,4158.39) 4447.59,4158.39 4455.5,4166.3 R14.1@4455.5,4243.39
  Bottom Layer w10: v2(4365.5,5473.39) 4365.5,4913.39 4380.5,4898.39 4380.5,4298.39 4385.5,4293.39 4385.5,4173.39 v2(4400.5,4158.39)
RX_0: IC1.99 S6.4 | length 1268.9
  Top Layer w10: v2(5445.5,5063.39) 5458.5,5050.38 IC1.99@5499.5,5050.38
  Bottom Layer w10: S6.4@5225.5,4128.39 5326.32,4128.39 5374.72,4176.79 5473.9,4176.79 5495.5,4198.39 5495.5,4300.36 5525.5,4330.36 5525.5,4928.39 5445.5,5008.39 v2(5445.5,5063.39)
SD_CS: IC1.79 R1.1 U1.2 | length 3648.9
  Top Layer w10: U1.2@3409,5690.89 3603,5690.89 3620.5,5673.39 3620.5,5518.39 3650.5,5488.39 3906.18,5488.39 R1.1@3910.5,5484.07 4316.18,5484.07 4376.5,5544.39 5711.5,5544.39 v1(5725.5,5558.39) ; IC1.79@5499.5,4656.38 5713.5,4656.38 v1(5720.5,4663.39)
  Bottom Layer w10: v1(5720.5,4663.39) 5730.5,4673.39 5730.5,5553.39 v1(5725.5,5558.39)
SD_MISO: IC1.77 R2.1 U1.7 | length 3972.7
  Top Layer w10: U1.7@3394,5907.89 3706,5907.89 3750.5,5863.39 R2.1@3910.5,5863.39 3930.5,5863.39 3980.5,5813.39 3980.5,5716.58 4092.7,5604.39 5651.5,5604.39 5705.5,5658.39 v1(5810.5,5658.39) ; IC1.77@5499.5,4616.38 5797.5,4616.38 v1(5800.5,4613.39)
  Bottom Layer w10: v1(5800.5,4613.39) 5810.5,4623.39 v1(5810.5,5658.39)
SD_MOSI: IC1.76 R3.1 U1.3 | length 3865.2
  Top Layer w10: U1.3@3394,5734.89 3644,5734.89 3670.5,5708.39 3670.5,5608.39 3680.5,5598.39 3865.5,5598.39 3910.5,5643.39 R3.1@3910.5,5668.09 ; R3.1@3915.5,5673.39 R3.1@3918.37,5670.52 ; IC1.76@5499.5,4597.38 5726.5,4597.38 v1(5740.5,4583.39) ; v1(5755.5,5588.39) 5710.5,5588.39 5685.5,5563.39 4032.6,5563.39 3922.6,5673.39 R3.1@3921.24,5673.39 ; R3.1@3910.5,5668.09 3915.94,5668.09 R3.1@3918.37,5670.52 ; R3.1@3910.5,5668.09 R3.1@3910.5,5674.07 3911.18,5673.39 R3.1@3914.82,5673.39 ; R3.1@3914.82,5673.39 3921.92,5674.07 R3.1@3921.24,5673.39 ; R3.1@3914.82,5673.39 R3.1@3921.24,5673.39 ; R3.1@3918.37,5670.52 R3.1@3921.24,5673.39
  Bottom Layer w10: v1(5740.5,4583.39) 5740.5,4638.39 5755.5,4653.39 5755.5,5578.39 v1(5755.5,5588.39)
SD_SCK: IC1.78 U1.5 | length 3804.8
  Top Layer w10: U1.5@3394,5820.89 3406.5,5808.39 3909.89,5808.39 3955.5,5762.78 3955.5,5688.39 4055.5,5588.39 5670.5,5588.39 5700.5,5618.39 5775.5,5618.39 v1(5780.5,5623.39) ; IC1.78@5499.5,4636.38 5773.5,4636.38 v1(5780.5,4643.39)
  Bottom Layer w10: v1(5780.5,4643.39) v1(5780.5,5623.39)
STP1: IC1.75 JP71.2 | length 5415.3
  Top Layer w10: JP71.2@3946.53,7158.15 4060.74,7158.15 4070.5,7148.39 4070.5,5958.39 4130.5,5898.39 5265.5,5898.39 5284.5,5917.39 5366.26,5917.39 5385.26,5898.39 6025.5,5898.39 v2(6050.5,5873.39) ; IC1.75@5426.5,4524.38 5426.5,4502.39 5440.5,4488.39 6000.5,4488.39 6015.5,4473.39 6015.5,4468.39 v2(6020.5,4463.39)
  Bottom Layer w10: v2(6020.5,4463.39) 6035.5,4463.39 6050.5,4478.39 v2(6050.5,5873.39)
STP2: IC1.74 JP91.2 | length 4260
  Top Layer w10: JP91.2@4733.93,7158.15 4865.74,7158.15 4880.5,7143.39 4880.5,6253.39 4908.51,6225.38 5618.51,6225.38 v2(5620.5,6223.39) ; IC1.74@5407.5,4524.38 5407.5,4481.39 5430.5,4458.39 v2(5865.5,4458.39)
  Bottom Layer w10: v2(5620.5,6223.39) 5650.5,6193.39 5800.5,6193.39 5845.5,6148.39 5845.5,4478.39 v2(5865.5,4458.39)
STP3: IC1.73 JP121.2 | length 3587.3
  Top Layer w10: IC1.73@5387.5,4524.38 5387.5,4461.39 5415.5,4433.39 v2(5925.5,4433.39)
  Mid-Layer 1 w10: JP121.2@5541.01,7158.15 5600.74,7158.15 5625.5,7133.39 5625.5,6358.39 5745.5,6238.39 v2(5803.75,6238.39)
  Bottom Layer w10: v2(5803.75,6238.39) 5840.5,6238.39 5905.5,6173.39 5905.5,4453.39 v2(5925.5,4433.39)
STP4: IC1.70 JP151.2 | length 3989.9
  Top Layer w10: IC1.70@5328.5,4524.38 5328.5,4440.39 5355.5,4413.39 5645.5,4413.39 5665.5,4393.39 6090.5,4393.39 6095.5,4388.39 v2(6110.5,4388.39) ; v2(6130.5,6088.39) 6140.5,6098.39 6395.5,6098.39 6450.5,6153.39 6450.5,7055.74 JP151.2@6348.1,7158.15
  Bottom Layer w10: v2(6110.5,4388.39) 6110.5,6068.39 v2(6130.5,6088.39)
STP5: IC1.65 JP181.2 | length 5262.1
  Top Layer w10: IC1.65@5229.5,4524.38 5229.5,4252.73 5343.84,4138.39 v2(5610.5,4138.39) ; v2(5630.5,4373.39) 6080.5,4373.39 6090.5,4363.39 v2(6145.5,4363.39) ; v2(6185.5,5853.39) 6195.5,5863.39 6655.5,5863.39 6680.5,5888.39 6680.5,6138.39 6720.5,6178.39 7105.5,6178.39 7220.5,6293.39 7220.5,7123.39 7185.74,7158.15 JP181.2@7135.49,7158.15
  Bottom Layer w10: v2(5610.5,4138.39) 5610.5,4353.39 v2(5630.5,4373.39) ; v2(6145.5,4363.39) 6150.5,4368.39 6150.5,4903.39 6180.5,4933.39 6180.5,5848.39 v2(6185.5,5853.39)
TX_0: IC1.98 S6.3 | length 1269.2
  Top Layer w10: v2(5420.5,5033.39) 5423.5,5030.38 IC1.98@5499.5,5030.38
  Bottom Layer w10: S6.3@5125.5,4128.39 5125.5,4203.39 5190.9,4268.78 5376.58,4268.78 5490.5,4382.7 5490.5,4928.39 5420.5,4998.39 v2@5420.5,5028.39
USB_D+: C5.2 IC1.29 R7.1 R8.2 | length 1381.2
  Top Layer w7.5: R8.2@3880.16,5168.39 3909.29,5168.39 3938.29,5197.39 4826.5,5197.39 4940.5,5083.39 4940.5,5023.39 4925.5,5008.39 4882.5,5008.39 4881.5,5009.39 IC1.29@4881.5,5010.38
  Top Layer w10: R7.1@3880.16,5033.39 C5.2@3880.16,5098.39 R8.2@3880.16,5168.39
USB_D-: C4.2 IC1.30 R9.2 | length 1382.2
  Top Layer w7.5: R9.2@3880.16,5238.39 3909.29,5238.39 3938.29,5209.39 4045.27,5209.39 ccw(c4045.27,5216.89) 4052.77,5216.89 4052.77,5220.89 cw(c4060.27,5220.89) 4060.27,5228.39 cw(c4060.27,5220.89) 4067.77,5220.89 4067.77,5216.89 ccw(c4075.27,5216.89) 4075.27,5209.39 4831.47,5209.39 4952.5,5088.36 4952.5,5018.42 4924.47,4990.38 IC1.30@4881.5,4990.38
  Top Layer w10: R9.2@3880.16,5238.39 C4.2@3880.16,5308.39